# EAGLE board Sistem Digital, Logic gate IC (EAGLE 9.7.0)

Size 344.03 x 141.31 mm. Coordinates in mm from the lower left corner, seen from the top.
Outline: 0,0 344.03,0 344.03,141.31 0,141.31 0,0
Copper layers (1*16): Top 0.035mm / dielectric 1.5mm / Bottom 0.035mm
Design rules "default": minimum track width 6mil, minimum drill 0.35mm, track to track 6mil, track to pad 6mil, pad to pad 6mil, via to via 6mil, smd to smd 6mil, copper to edge 40mil, drill to drill 6mil, minimum pad ring 10mil, minimum via ring 8mil, stop-mask expansion 4mil, vias tented up to drill 0mil, thermal gap 10mil

## Footprints (pad centres in the part's own frame; a part is rotated, then mirrored left to right if it is on the bottom)
LEDRD254W60D565H860B = drill 0.981 pad 1.581: 1 -1.27,0; 2 1.27,0
BATTERY-GENERIC = drill 1.118 pad 3.15 octagon: + 2.54,0; - -2.54,0
RESAD1016W63L850D250B = drill 0.83 pad 1.43: 1 -5.08,0; 2 5.08,0
78B04ST = drill 0.8: 1 -3.81,-3.81; 2 -1.27,-3.81; 3 1.27,-3.81; 4 3.81,-3.81; 5 3.81,3.81; 6 1.27,3.81; 7 -1.27,3.81; 8 -3.81,3.81
78F01T = drill 0.8: 1 -1.27,-3.81; 2 1.27,-3.81; 3 1.27,3.81; 4 -1.27,3.81
DIP762W53P254L1969H508Q14B = drill 0.743 pad 1.343: 1 -3.81,7.62; 2 -3.81,5.08; 3 -3.81,2.54; 4 -3.81,0; 5 -3.81,-2.54; 6 -3.81,-5.08; 7 -3.81,-7.62; 8 3.81,-7.62; 9 3.81,-5.08; 10 3.81,-2.54; 11 3.81,0; 12 3.81,2.54; 13 3.81,5.08; 14 3.81,7.62

## Placement (x,y rotation side)
D1  RED  [LEDRD254W60D565H860B]  113.75,118.41 270 top
D2  RED  [LEDRD254W60D565H860B]  205.55,114.04 270 top
D3  RED  [LEDRD254W60D565H860B]  210.55,21.34 270 top
D4  RED  [LEDRD254W60D565H860B]  49.35,117.07 270 top
D5  RED  [LEDRD254W60D565H860B]  132.62,18.82 270 top
D6  RED  [LEDRD254W60D565H860B]  44.65,22.29 270 top
D7  RED  [LEDRD254W60D565H860B]  319.92,75.89 270 top
P1  BATTERYGENERIC  [BATTERY-GENERIC]  16.09,127.63 180 top
P2  BATTERYGENERIC  [BATTERY-GENERIC]  156.48,121.37 180 top
P3  BATTERYGENERIC  [BATTERY-GENERIC]  87.47,125.07 180 top
P4  BATTERYGENERIC  [BATTERY-GENERIC]  8.26,33.9 180 top
P5  BATTERYGENERIC  [BATTERY-GENERIC]  92.65,32.99 180 top
P6  BATTERYGENERIC  [BATTERY-GENERIC]  175.23,37.86 180 top
P7  BATTERYGENERIC  [BATTERY-GENERIC]  273.54,92.27 180 top
R1  220  [RESAD1016W63L850D250B]  205.55,120.39 90 top
R2  220  [RESAD1016W63L850D250B]  49.35,123.42 90 top
R3  220  [RESAD1016W63L850D250B]  113.75,124.76 90 top
R4  220  [RESAD1016W63L850D250B]  319.92,82.24 90 top
R5  220  [RESAD1016W63L850D250B]  44.65,28.64 90 top
R6  220  [RESAD1016W63L850D250B]  122.54,27.33 90 top
R7  220  [RESAD1016W63L850D250B]  210.55,27.69 90 top
SW1  SPST-478B04ST  [78B04ST]  186.5,14.1 0 top
SW2  SPST-478B04ST  [78B04ST]  170,100.17 0 top
SW3  SPST-478B04ST  [78B04ST]  27.42,102.98 0 top
SW4  DPST78F01T  [78F01T]  97.17,111.08 0 top
SW5  SPST-478B04ST  [78B04ST]  105.76,9.53 0 top
SW6  SPST-478B04ST  [78B04ST]  19.83,10.44 0 top
SW7  SPST-478B04ST  [78B04ST]  287.01,66.29 0 top
U1  74HC04_PDIP  [DIP762W53P254L1969H508Q14B]  118.83,133.65 90 top
U2  74HC08_PDIP  [DIP762W53P254L1969H508Q14B]  51.89,132.31 90 top
U3  74HC32_PDIP  [DIP762W53P254L1969H508Q14B]  208.09,129.28 90 top
U4  74HC00_PDIP  [DIP762W53P254L1969H508Q14B]  47.19,37.53 90 top
U5  74HC02_PDIP  [DIP762W53P254L1969H508Q14B]  130.16,36.22 90 top
U6  74HC86_PDIP  [DIP762W53P254L1969H508Q14B]  213.09,36.58 90 top
U7  74HC04_PDIP  [DIP762W53P254L1969H508Q14B]  336.37,81.92 0 top
U8  74HC86_PDIP  [DIP762W53P254L1969H508Q14B]  311.42,101.39 90 top

## Library data of the parts
D1-D7 = Tinkercad; CATEGORY: Opto-Electronic; SUB-CATEGORY: LED; VALUE: LED_RED
P1-P7 R1-R7 SW1-SW7 U1-U8 = Tinkercad

## Nets
D1_A: D1.1 R3.1
D2_A: D2.1 R1.1
D3_A: D3.1 R7.1
D4_A: D4.1 R2.1
D5_A: D5.1 R6.1
D6_A: D6.1 R5.1
D7_A: D7.1 R4.1
P1+: P1.+ SW3.7 SW3.8 U2.14
P1-: D4.2 P1.- U2.7
P2+: P2.+ SW2.7 SW2.8 U3.14
P2-: D2.2 P2.- U3.7
P3+: P3.+ SW4.4 U1.14
P3-: D1.2 P3.- U1.7
P4+: P4.+ SW6.7 SW6.8 U4.14
P4-: D6.2 P4.- U4.7
P5+: P5.+ SW5.7 SW5.8 U5.14
P5-: D5.2 P5.- U5.7
P6+: P6.+ SW1.7 SW1.8 U6.14
P6-: D3.2 P6.- U6.7
P7+: P7.+ SW7.7 SW7.8 U7.14
P7-: D7.2 P7.- U7.7 U8.7
U1_1A: SW4.1 U1.1
U1_1Y: R3.2 U1.2
U2_1A: SW3.1 U2.1
U2_1B: SW3.2 U2.2
U2_1Y: R2.2 U2.3
U3_1A: SW2.1 U3.1
U3_1B: SW2.2 U3.2
U3_1Y: R1.2 U3.3
U4_1A: SW6.1 U4.1
U4_1B: SW6.2 U4.2
U4_1Y: R5.2 U4.3
U5_1A: SW5.1 U5.2
U5_1B: SW5.2 U5.3
U5_1Y: R6.2 U5.1
U6_1A: SW1.1 U6.1
U6_1B: SW1.2 U6.2
U6_1Y: R7.2 U6.3
U7_1Y: R4.2 U7.2
U8_1A: SW7.1 U8.1
U8_1B: SW7.2 U8.2
U8_1Y: U7.1 U8.3

## Tracks (layer width: path | path; a pad name or v marks a point on that pad's centre or on a via)
D1_A  (1 unrouted)
D2_A  (1 unrouted)
D3_A  (1 unrouted)
D4_A  (1 unrouted)
D5_A  (1 unrouted)
D6_A  (1 unrouted)
D7_A  (1 unrouted)
P1+  (3 unrouted)
P1-  (2 unrouted)
P2+  (3 unrouted)
P2-  (2 unrouted)
P3+  (2 unrouted)
P3-  (2 unrouted)
P4+  (3 unrouted)
P4-  (2 unrouted)
P5+  (3 unrouted)
P5-  (2 unrouted)
P6+  (3 unrouted)
P6-  (2 unrouted)
P7+  (3 unrouted)
P7-  (3 unrouted)
U1_1A  (1 unrouted)
U1_1Y  (1 unrouted)
U2_1A  (1 unrouted)
U2_1B  (1 unrouted)
U2_1Y  (1 unrouted)
U3_1A  (1 unrouted)
U3_1B  (1 unrouted)
U3_1Y  (1 unrouted)
U4_1A  (1 unrouted)
U4_1B  (1 unrouted)
U4_1Y  (1 unrouted)
U5_1A  (1 unrouted)
U5_1B  (1 unrouted)
U5_1Y  (1 unrouted)
U6_1A  (1 unrouted)
U6_1B  (1 unrouted)
U6_1Y  (1 unrouted)
U7_1Y  (1 unrouted)
U8_1A  (1 unrouted)
U8_1B  (1 unrouted)
U8_1Y  (1 unrouted)